# Altium PCB NacelleV2.2shop.PcbDoc
Units mil, origin at the board's own origin, x right, y up, seen from the top; angles counter-clockwise.
Board outline 2535 x 2785 mil, 2 copper layers (Top Layer, Bottom Layer); 16 components, 9 nets, 38 pads, 0 vias.
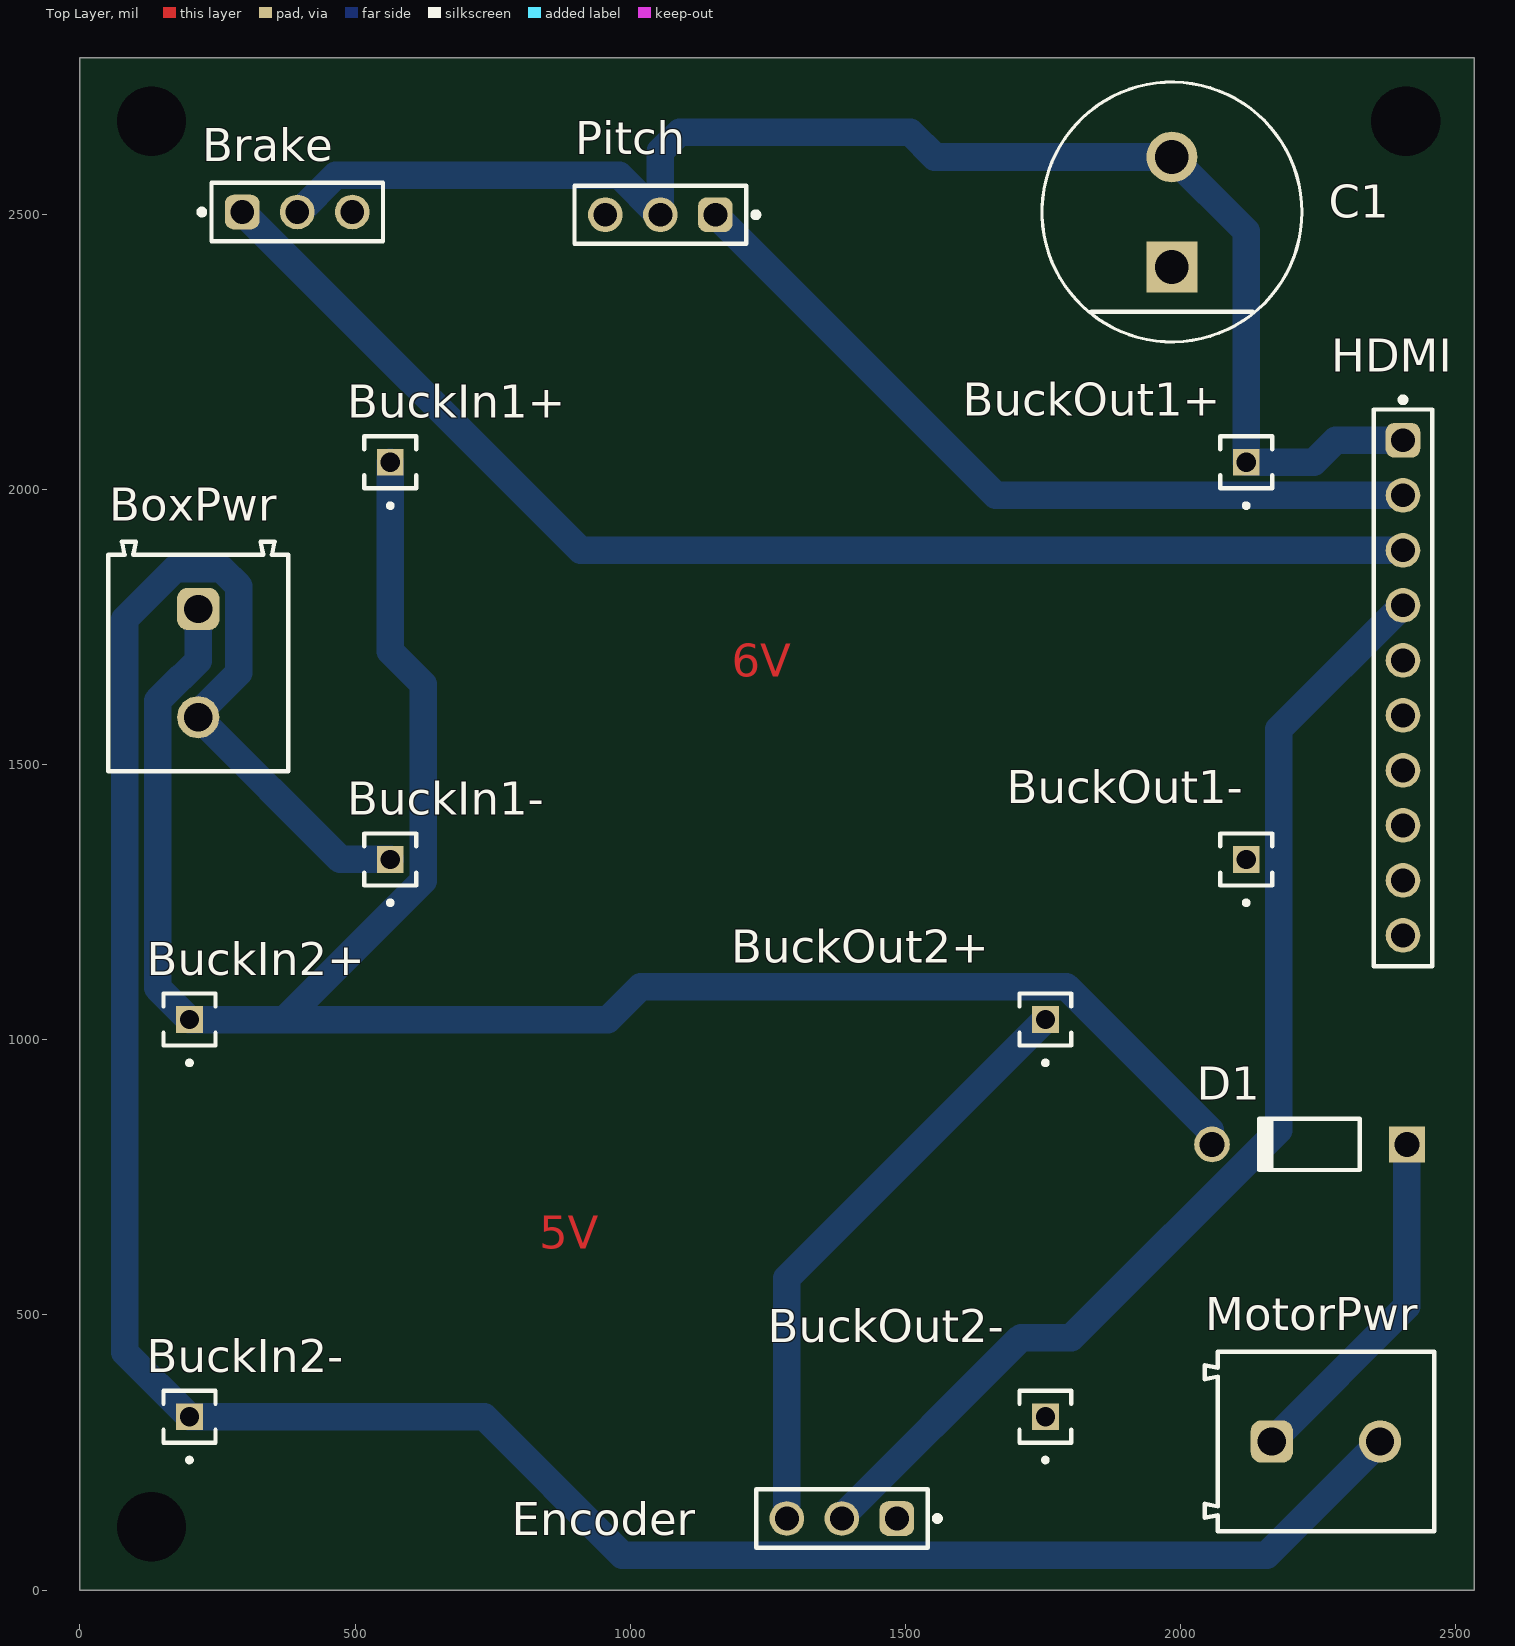
[diagram p0: Top Layer view]
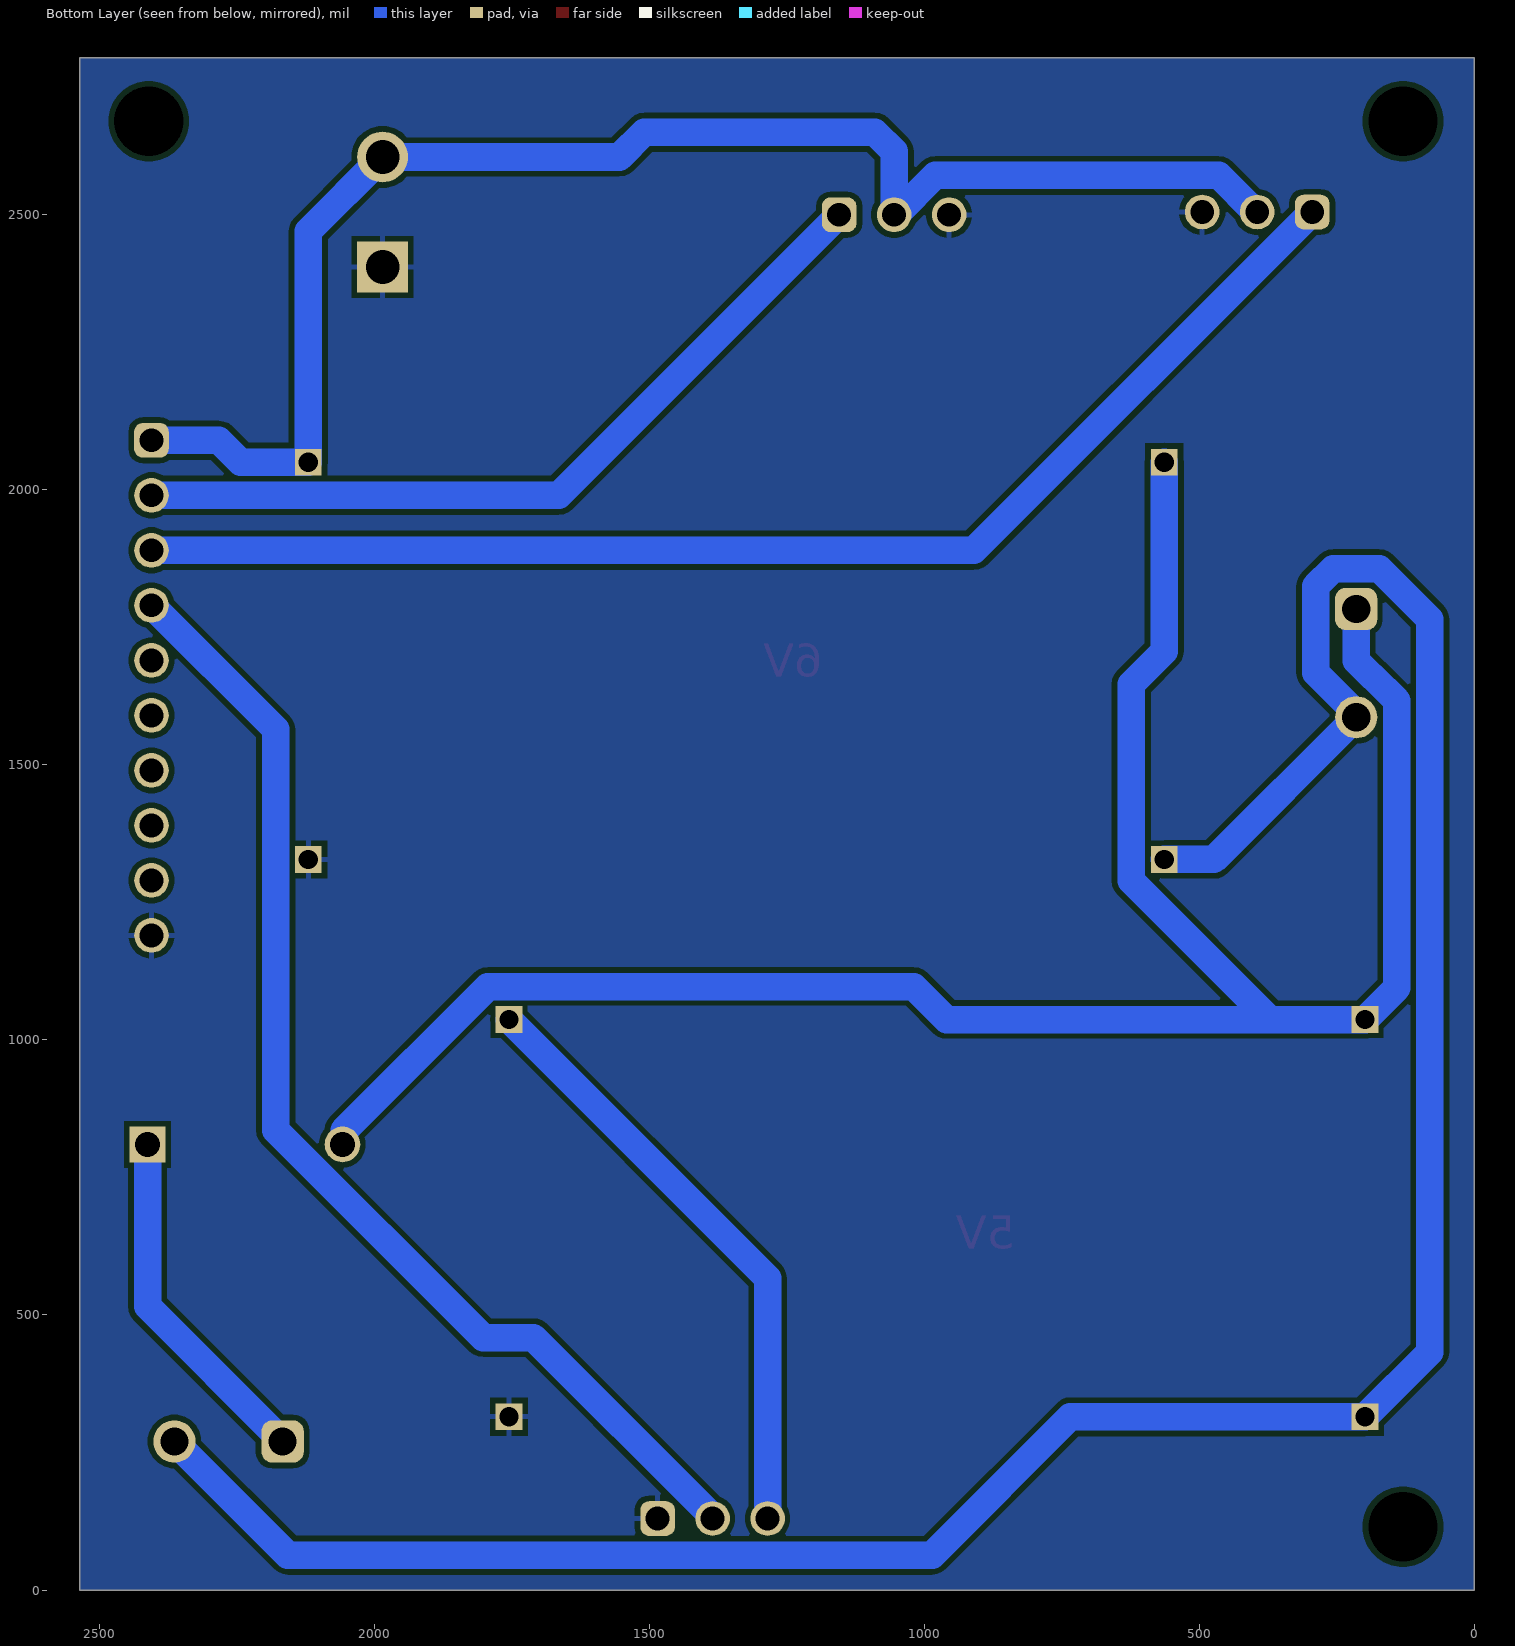
[diagram p1: Bottom Layer view, seen from below]
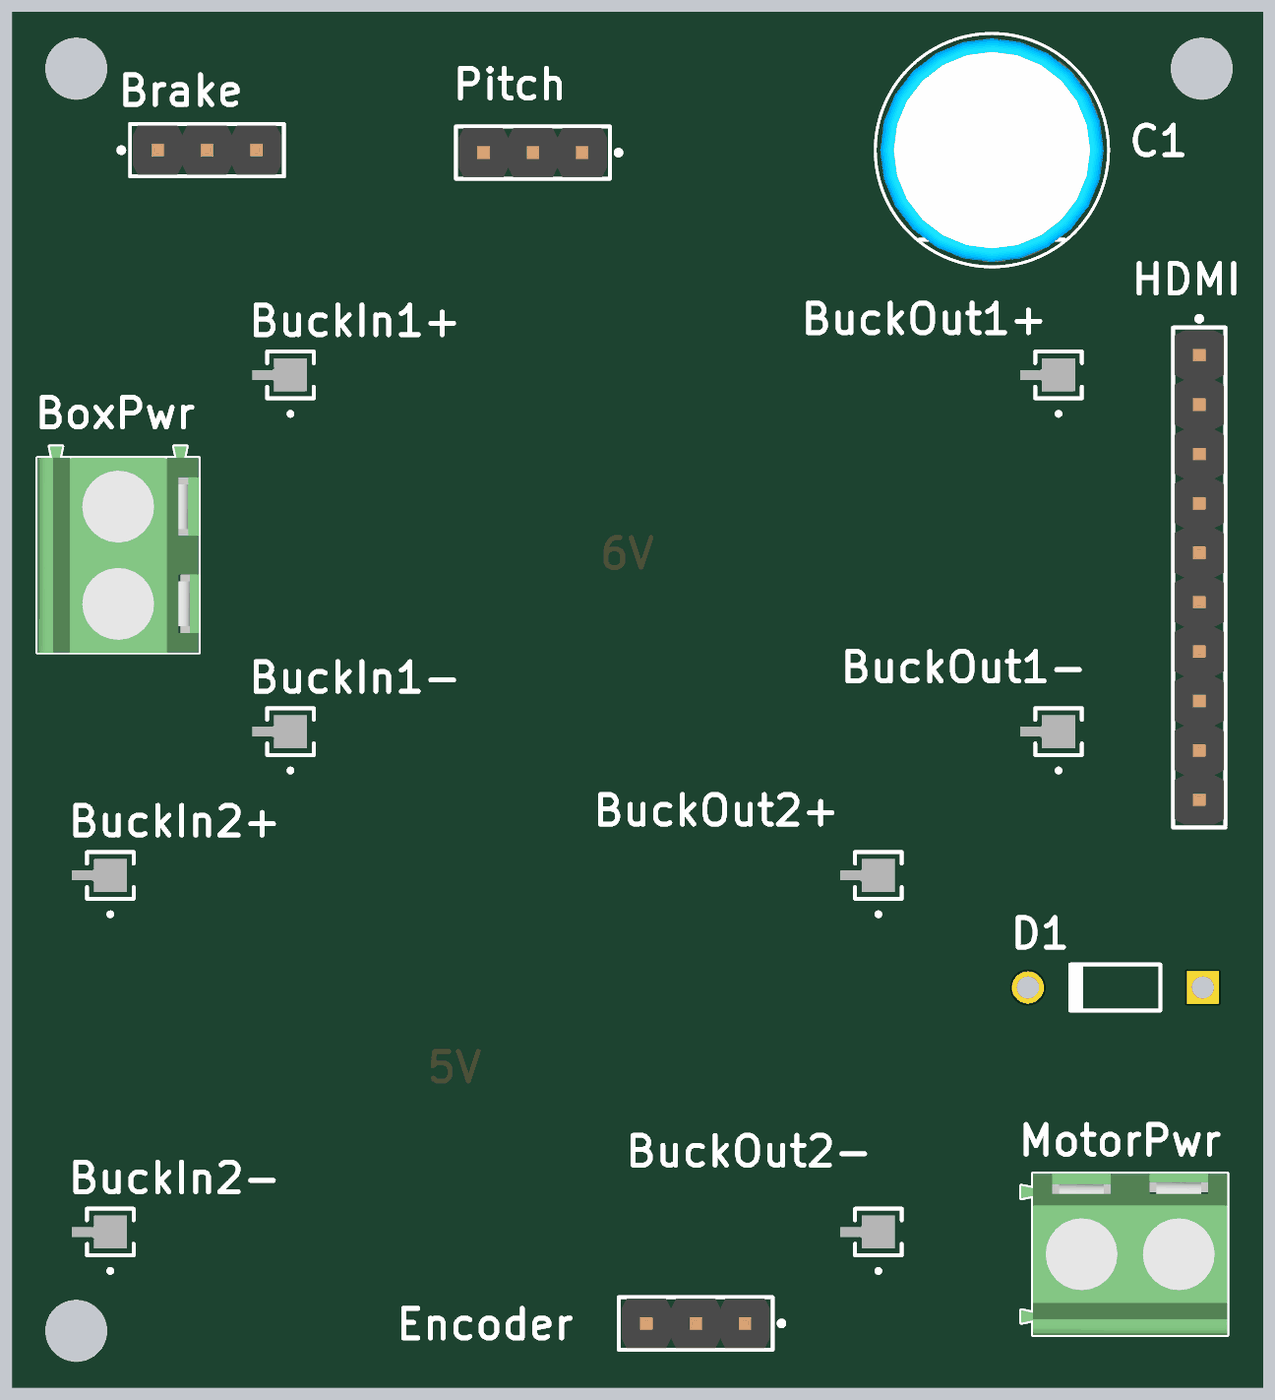
[diagram p2: 3D render of the assembled board from above, using the file's embedded part models]

## Layer stack, top to bottom
Top Solder: solder mask 0.4, Solder Resist, Dk 3.5
Top Layer: signal copper 1.4
Dielectric 1: dielectric 12.6, FR-4, Dk 4.8
Bottom Layer: signal copper 1.4
Bottom Solder: solder mask 0.4, Solder Resist, Dk 3.5

## Board outline
0,0 2535,0 2535,2785 0,2785

## Design rules (kind name [scope] priority, off if disabled: settings)
Clearance [All] p1: gap=10 ignorepadtopadclearanceinfootprint=FALSE
PolygonConnect [All] p1: connectstyle=Relief reliefconductorwidth=10 reliefentries=4 polygonreliefangle="90 Angle" airgapwidth=10
RoutingVias [All] p1: holewidth=28 width=50 viastyle="Through Hole" minholewidth=28 minwidth=50 maxholewidth=28 maxwidth=50
SolderMaskExpansion [All] p1: expansion=4 istentingtop=FALSE
Width [All] p1: maxlimit=50 minlimit=10 preferedwidth=50 minimp=50.000000 maximp=50.000000 favimp=50.000000
30 further rules are at their usual default settings.

## Components (designator, comment, footprint, x,y, rotation, side; value= is the part's Value field where it differs from the comment)
BoxPwr "691213710002" 691213710002 215,1685 r270 top
Brake "61300311121" 61300311121 395,2505 r0 top (schematic designator BrakeActuator)
BuckIn1+ "MTMM-101-04-G-S-098" SAMTEC_MTMM-101-04-G-S-098 564,2050 r90 top
BuckIn1- "MTMM-101-04-G-S-098" SAMTEC_MTMM-101-04-G-S-098 564,1328 r90 top (schematic designator BuckIn-)
BuckIn2+ "MTMM-101-04-G-S-098" SAMTEC_MTMM-101-04-G-S-098 199,1037 r90 top
BuckIn2- "MTMM-101-04-G-S-098" SAMTEC_MTMM-101-04-G-S-098 199,315 r90 top
BuckOut1+ "MTMM-101-04-G-S-098" SAMTEC_MTMM-101-04-G-S-098 2120,2050 r90 top
BuckOut1- "MTMM-101-04-G-S-098" SAMTEC_MTMM-101-04-G-S-098 2120,1328 r90 top
BuckOut2+ "MTMM-101-04-G-S-098" SAMTEC_MTMM-101-04-G-S-098 1755,1037 r90 top
BuckOut2- "MTMM-101-04-G-S-098" SAMTEC_MTMM-101-04-G-S-098 1755,315 r90 top
C1 "FT0H104ZF" FP-FT0H104ZF-MFG 1985,2505 r90 top value=0.1F
D1 "1N4001-T" DIOD-DO-41-P-2_V 2235,810 r180 top
Encoder "61300311121" 61300311121 1385,130 r180 top
HDMI "61301011121" 61301011121 2405,1640 r270 top
MotorPwr "691213710002" 691213710002 2265,270 r0 top
Pitch "61300311121" 61300311121 1055,2500 r180 top (schematic designator PitchActuator)

## Footprints (in the part's own frame and the unit in brackets; to place one, negate y for a bottom-side part, rotate by r counter-clockwise, add the part's x,y. Pads: shape width x height; smd on the part's side, far side on the other; paste and mask are expansions set on the pad)
61300311121 [mm] "Pin Header, pitch 2.54 mm, THT, Vertical, single row, 3p"
  rrect50% 1.6x1.6 hole 1.1: 1(-2.54,0)
  round 1.6 hole 1.1: 2(0,0) 3(2.54,0)
  silkscreen extent -4.53,-1.35 3.96,1.35, body extent -3.81,-1.27 3.81,1.27, height 8.57
61301011121 [mm] "Pin Header, pitch 2.54 mm, THT, Vertical, single row, 10p"
  rrect50% 1.6x1.6 hole 1.1: 1(-11.43,0)
  round 1.6 hole 1.1: 2(-8.89,0) 3(-6.35,0) 4(-3.81,0) 5(-1.27,0) 6(1.27,0) 7(3.81,0) 8(6.35,0) 9(8.89,0) 10(11.43,0)
  silkscreen extent -13.42,-1.35 12.85,1.35, body extent -12.7,-1.27 12.7,1.27, height 8.57
691213710002 [mm] "5,00mm - modular - green - Horizontal entry with rising cage clamp -  10,0mm height - 02p"
  rrect50% 1.95x1.95 hole 1.3: 1(-2.5,0)
  round 1.95 hole 1.3: 2(2.5,0)
  silkscreen extent -5.6,-4.15 5,4.15, body extent -5.6,-4.15 5,4.15, height 10.05
DIOD-DO-41-P-2_V [mm] "2-Leads, Axial Lead, Body 4.635x2.36mm, Pin Spacing 9mm"
  rect 1.65x1.65 hole 1.15: 1(-4.5,0)
  round 1.65 hole 1.15: 2(4.5,0)
  silkscreen extent -2.32,-1.18 2.32,1.18, body extent -4.93,-1.18 4.93,1.18, height 2.35
FP-FT0H104ZF-MFG [mm]
  rect 2.35x2.35 hole 1.55 paste-2539.97 mask+0: 1(-2.54,0)
  round 2.35 hole 1.55 paste-2539.97 mask+0: 2(2.54,0)
  silkscreen extent -6,-6 6,6, body extent -6.1,-6.1 6.1,6.1, height 0.25
SAMTEC_MTMM-101-04-G-S-098 [mm]
  rect 1.24x1.24 / inner round 1.24 / far side rect 1.24x1.24 hole 0.89: 01(0,0)
  silkscreen extent -2.1,-1.2 1.2,1.2

## Part data
BoxPwr MotorPwr: library part CMP-1502-02526-2, Color=Green, Current=10A, Max Operating Temperature=105°C, Min Operating Temperature=-40°C, Voltage=300V, Contact Material=Brass, Contact Plating=Tin, Current Rating=10A, Height=10mm, Housing Material=Nylon, Lead Pitch=5mm, Length=8.3mm, Mount="Through Hole", NexarPartId=8917718, Number of Contacts=2, Number of Levels=1, Number of Pins=2, Number of Positions Per Level=2, Packaging=Box, Pitch=5.0038mm, Plating="Brass, Steel", REACH SVHC=Unknown, RoHS=Compliant, Stripping Length=-7mm, Termination=Screw, Voltage Rating=300V, Width=10.6mm, Wire Gauge (Max)=26AWG, Wire Gauge (Min)=16AWG, Wire/Cable Gauge=26AWG
Brake Encoder Pitch: library part CMP-1502-01062-3, Color=Black, Contact Resistance=20mΩ, Current Rating=3A, Max Operating Temperature=105°C, Min Operating Temperature=-40°C, Operating Supply Voltage=250V, Connector Type="Male Pin", Contact Material=Copper, Contact Mating Length=5.9944mm, Contact Plating=Gold, Gender=Male, Height=8.94mm, Lead Free="Lead Free", Lead Pitch=2.54mm, Mount="Through Hole", NexarPartId=32855521, Number of Contacts=3, Number of Pins=3, Number of Positions=3, Number of Rows=1, Orientation=Vertical, Packaging=Bulk, Pitch=2.54mm, REACH SVHC=Unknown, RoHS=Compliant, Termination=Solder, Voltage Rating=250V
BuckIn1+ BuckIn1- BuckIn2+ BuckIn2- BuckOut1+ BuckOut1- BuckOut2+ BuckOut2-: "Connector Header Through Hole 1 position -", Package=None, Check_prices=https://www.snapeda.com/parts/MTMM-101-04-G-S-098/Samtec/view-part/?ref=eda, MF=Samtec, MP=MTMM-101-04-G-S-098, SnapEDA_Link=https://www.snapeda.com/parts/MTMM-101-04-G-S-098/Samtec/view-part/?ref=snap
C1: library part CMP-03024-000005-1, "CAP 100MF -20% +80% 5.5V T/H", Capacitance=0.1F, Manufacturer=KEMET, Temperature="-40°C to +85°C", Temperature Range High=+85°C, Temperature Range Low=-40°C, Tolerance=+80/-20%, Voltage Rating=5.5V, Automotive=No, Category=Cap, ComponentLink2Description=Datasheet, ComponentLink2URL=https://content.kemet.com/datasheets/KEM_S6014_FT.pdf, Device Class L1="Passive Components", Device Class L2=Capacitors, Device Class L3=Supercapacitors, Digikey Description="CAP 100MF -20% +80% 5.5V T/H", Height=8.5mm, Ipc Land Pattern Name=CAPRD508W155D1150H850, Lead Free=Yes, Manufacturer Part Number=FT0H104ZF, Mouser Description="Super Capacitor Capacitance tolerance: -20/+80% Capacitance: 0.1 F Rated voltage: 5.5 VDC", Octopart=https://octopart.com/ft0h104zf-kemet-30531663, Package=FT0H104ZF, RoHS=TRUE
D1: library part CMP-0639-00006-2, "1.0 A Rectifier, 15 pF, 50 V, -65 to 150 degC, 2-Pin DO-41 Plastic, RoHS, Tape and Reel", Manufacturer="Diodes Inc", Max. Average Rectified Current IO (A)=1, Operating Temperature Range (degC)="-65 to 150", ComponentLink1Description="Manufacturer URL", ComponentLink1URL=http://diodes.com/, ComponentLink2Description=Datasheet, ComponentLink2URL=http://diodes.com/datasheets/ds28002.pdf, CT (pF)=15, DatasheetVersion="Rev. 8-2", Max. IFSM (A)=30, Max. IR (uA)=5, Mounting Technology="Through Hole", PackageDescription="2-Pin Axial Lead, Body 4.635 x 2.36 mm, Lead Spread 25.4 mm", PackageReference=DO-41-P-2, Packing="Tape and Reel", PartNumber=1N4001-T, RoHS=TRUE, VF (V)=1, VRRM (V)=50
HDMI: library part CMP-1502-01082-5, Color=Black, Contact Resistance=20mΩ, Current Rating=3A, Flammability Rating="UL94 V-0", Insulation Resistance=1GΩ, Max Operating Temperature=105°C, Min Operating Temperature=-40°C, Operating Supply Voltage=250V, Connector Type="Male Pin", Contact Gender=Male, Contact Material=Copper, Contact Mating Length=5.9944mm, Contact Plating=Gold, Gender=Male, Height=8.74mm, Housing Material=PBT, Lead Pitch=2.54mm, Length=2.54mm, Mount="Through Hole", NexarPartId=18818159, Number of Contacts=10, Number of Pins=10, Number of Positions=10, Number of Rows=1, Orientation=Vertical, Packaging=Bulk, Pitch=2.54mm, REACH SVHC=Unknown, RoHS=Compliant, Termination=Solder, Voltage Rating=250V, Width=25.4mm

## Free pads (board coordinates)
  round 60 hole 125.98 unplated: 2(2410,2670) 3(130,2670) 4(130,115)

## Nets (pads, with @x,y where several pads share a name; then routed paths per layer and width w, separated by ;. In a path a pad name is that pad's centre, name@x,y a point inside that pad or via, vN(x,y) a via of type N, cw(c..) or ccw(c..) an arc to the next point about the centre after c; other vN are vias at no path point)
5V: BuckOut2+.01 Encoder.3 | length 1101.7
  Bottom Layer w50: Encoder.3 1285,567 BuckOut2+.01
6V: Brake.2 BuckOut1+.01 C1.2 HDMI.1 Pitch.2 | length 2718.1
  Top Layer w50: Brake.2 Brake.2@398.52,2505 ; Pitch.2@1051.48,2500 Pitch.2 Pitch.2@1055,2503.26
  Bottom Layer w50: Brake.2 398.52,2505 465.01,2571.5 979.99,2571.5 1051.48,2500 Pitch.2 1055,2615 1090,2650 1509.25,2650 1554.25,2605 C1.2 2120,2470 BuckOut1+.01 2242.5,2050 2282.5,2090 HDMI.1
Brake: Brake.1 HDMI.3 | length 2364.7
  Bottom Layer w50: Brake.1 910,1890 HDMI.3
Encoder: Encoder.2 HDMI.4 | length 2139.4
  Top Layer w50: Encoder.2@1385,126.74 Encoder.2
  Bottom Layer w50: Encoder.2 1385,133.26 1710.7,458.96 1802.23,458.96 2179.41,836.14 2179.41,1564.41 HDMI.4
GND: Brake.3 BuckOut1-.01 BuckOut2-.01 C1.1 Encoder.1 HDMI.10 Pitch.3
NetBoxPwr_1: BoxPwr.1 BuckIn1+.01 BuckIn2+.01 D1.2 | length 3959.5
  Bottom Layer w50: BoxPwr.1 215,1689.25 185.71,1659.96 184.6,1659.96 141.61,1616.97 141.61,1094.39 BuckIn2+.01 371.32,1037 ; BuckIn1+.01 564,1706.57 624,1646.57 624,1289.68 371.32,1037 ; D1.2 2054.97,812.86 2054.97,835.34 1793.32,1097 1019.43,1097 959.43,1037 371.32,1037
NetBoxPwr_2: BoxPwr.2 BuckIn1-.01 BuckIn2-.01 MotorPwr.2 | length 4843
  Top Layer w50: MotorPwr.2@2356.18,270 MotorPwr.2
  Bottom Layer w50: BuckIn1-.01 473.58,1328 BoxPwr.2 215,1593.82 288.39,1667.21 288.39,1825.07 256.64,1856.81 173.36,1856.81 81.61,1765.07 81.61,432.39 BuckIn2-.01 734.64,315 986.13,63.5 2156.93,63.5 MotorPwr.2
NetD1_1: D1.1 MotorPwr.1 | length 641.7
  Bottom Layer w50: MotorPwr.1 2412.17,515.59 D1.1
Pitch: HDMI.2 Pitch.1 | length 1461.2
  Bottom Layer w50: Pitch.1 1665,1990 HDMI.2
pads on no net: HDMI.5 HDMI.6 HDMI.7 HDMI.8 HDMI.9

## Polygon pours and split planes (outlines as drawn)
GND on Bottom Layer "GND_L02_P001" (solid, pour order 1): 0,0 0,2785 2535,2785 2535,0

## Other copper
Top Layer:
  text "6V" at 1185,1660 h60
  text "5V" at 835,620 h60